# Altium PCB Monostable_generator_PIC10(L)F322.PcbDoc
Units mm, origin at the board's own origin, x right, y up, seen from the top; angles counter-clockwise.
Board outline 24.4 x 24.4 mm, 2 copper layers (Top Layer, Bottom Layer), stack 1.672 mm thick; 11 components, 12 nets, 33 pads, 1 vias.
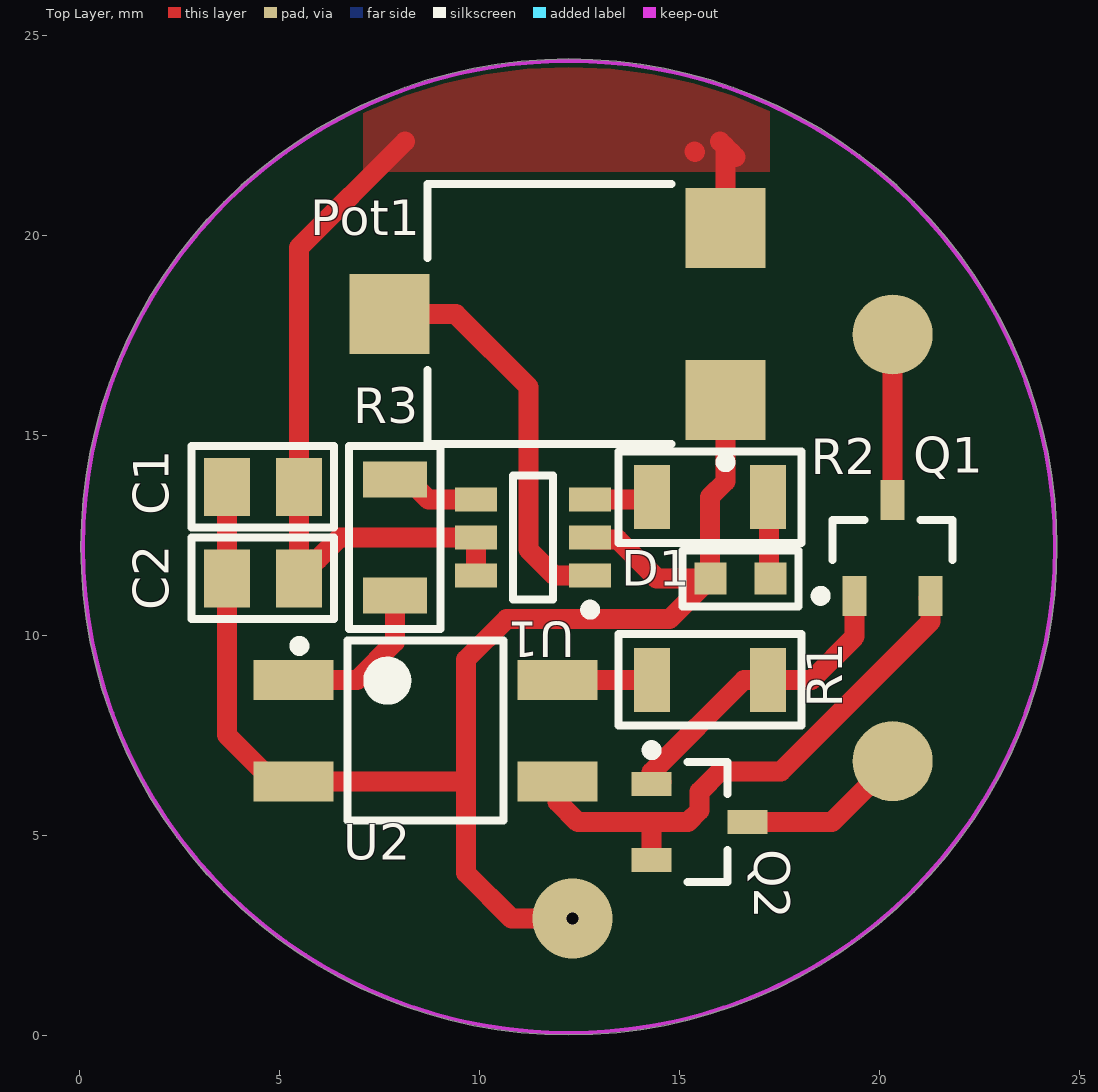
[diagram p0: Top Layer view]
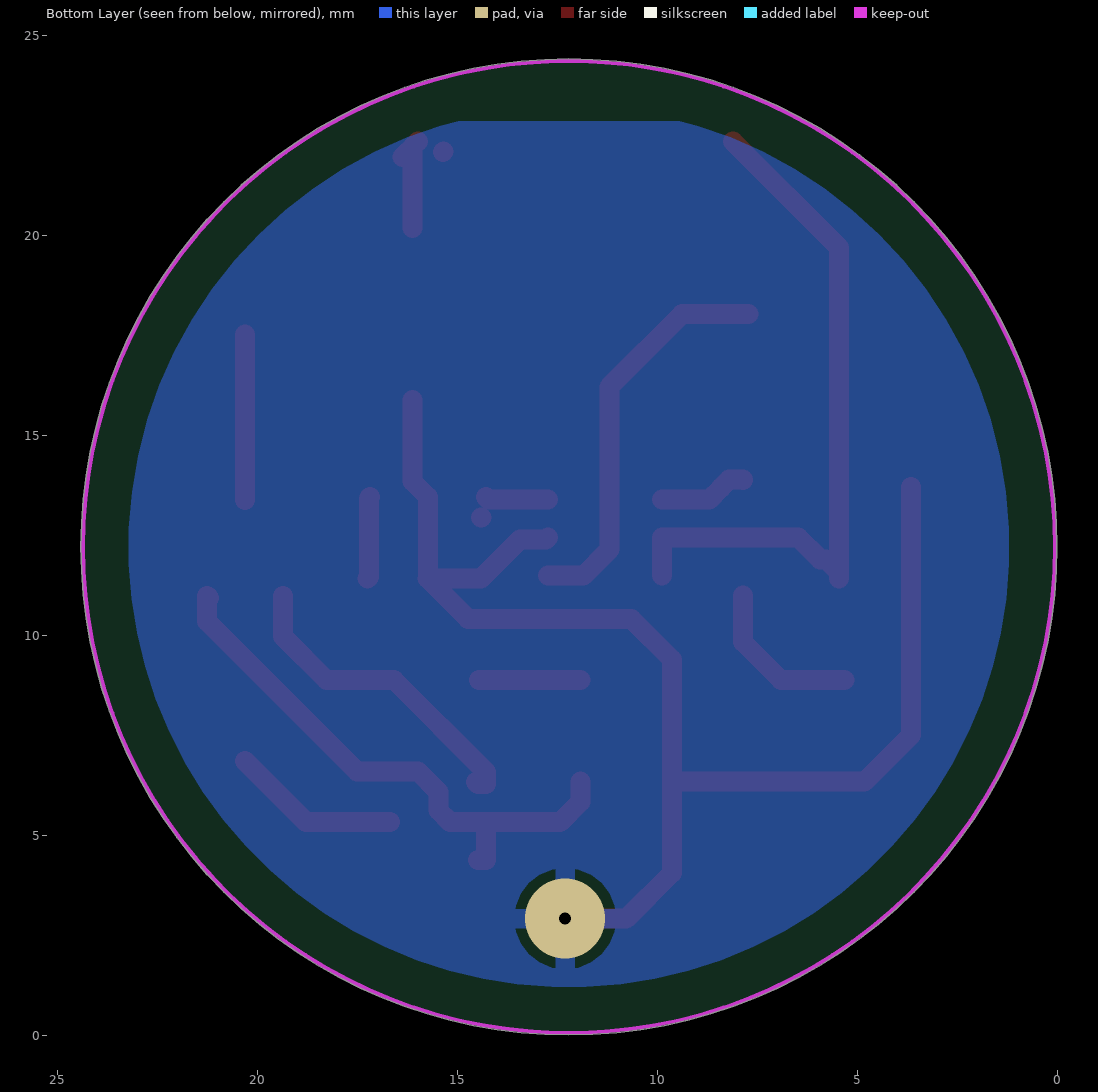
[diagram p1: Bottom Layer view, seen from below]
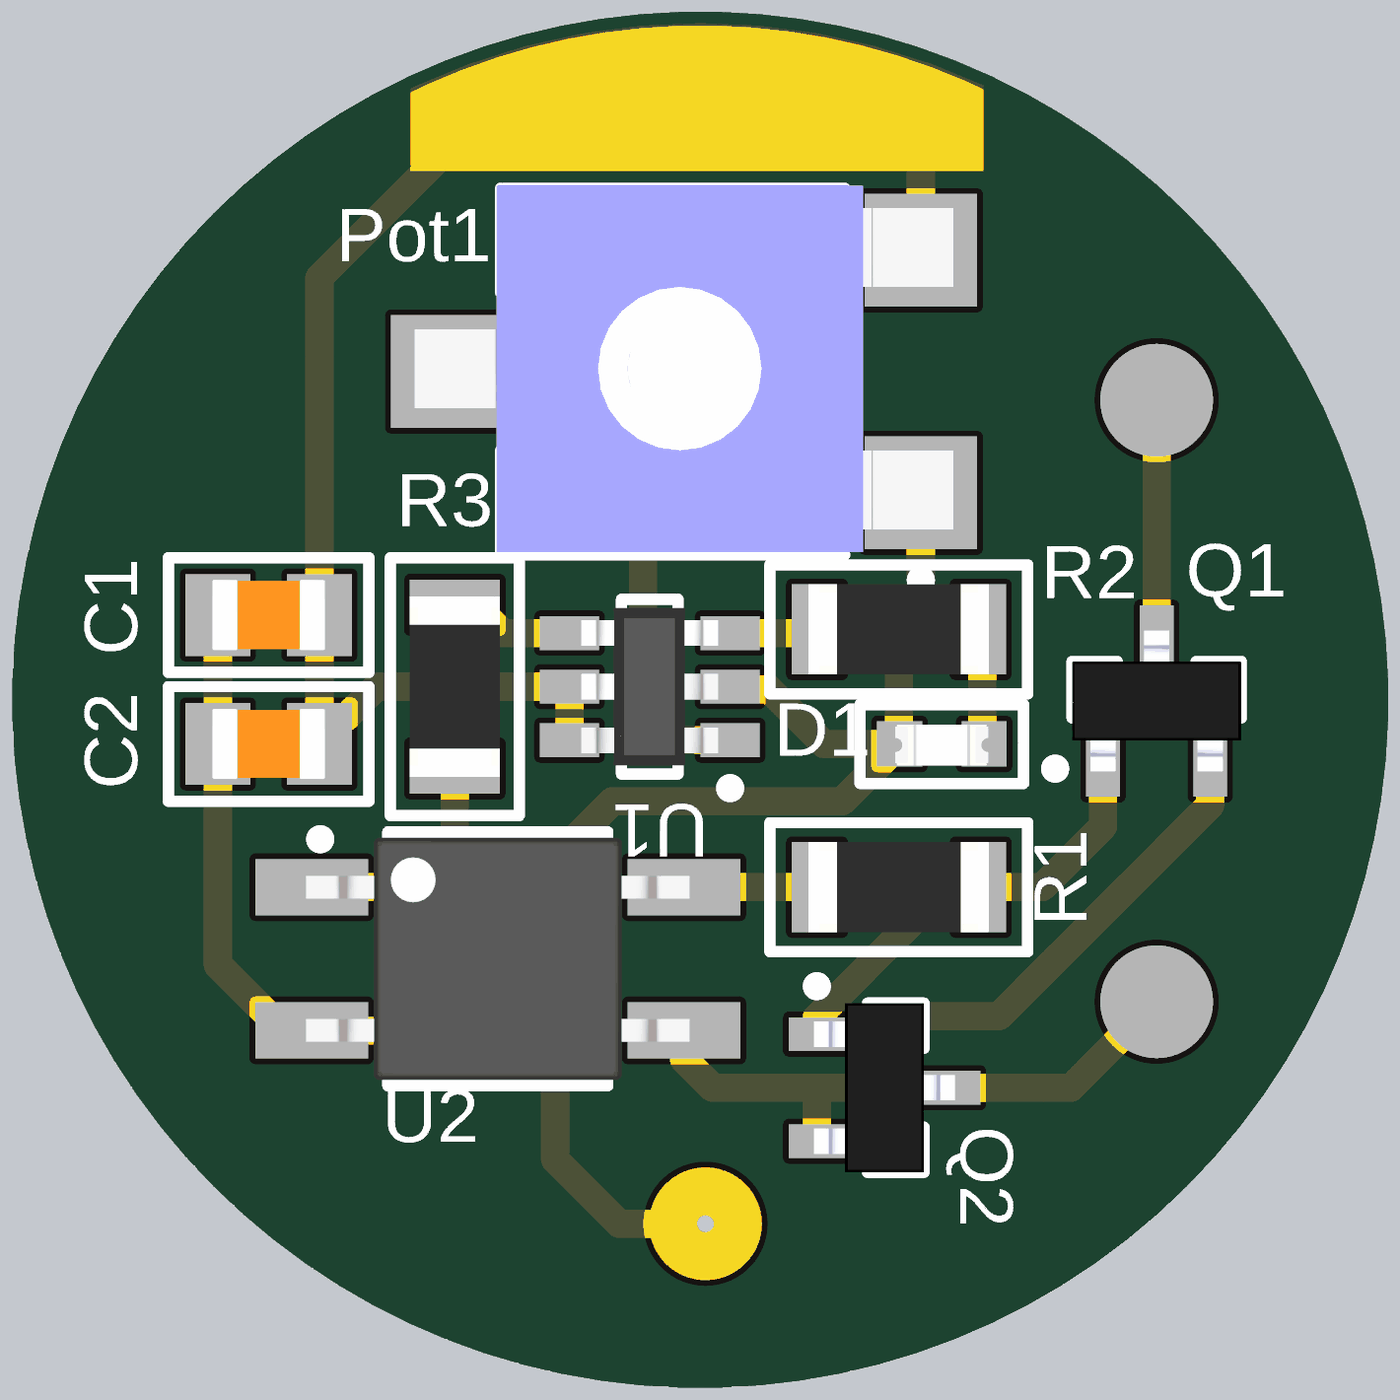
[diagram p2: 3D render of the assembled board from above, using the file's embedded part models]

## Layer stack, top to bottom
Top Solder: solder mask 0.01, Solder Resist, Dk 3.5
Top Layer: signal copper 0.036
Dielectric 1: dielectric 1.6, FR-4, Dk 4.8
Bottom Layer: signal copper 0.036
Bottom Solder: solder mask 0.01, Solder Resist, Dk 3.5

## Board outline
0.026,12.214 ccw(c12.226,12.214) 12.226,0.014 ccw(c12.226,12.214) 24.426,12.214 ccw(c12.226,12.214) 12.226,24.414 ccw(c12.226,12.214)

## Design rules (kind name [scope] priority, off if disabled: settings)
Clearance Clearance_1 [All] p1: gap=0.3 ignorepadtopadclearanceinfootprint=FALSE except(0.1: Arc-Arc Arc-Track Arc-SMDPad Arc-THPad Arc-Via Arc-Fill Arc-Poly Arc-Region Arc-Text Arc-Hole Track-Track Track-SMDPad Track-THPad Track-Via Track-Fill Track-Poly Track-Region Track-Text Track-Hole Fill-Poly Poly-Poly)
DiffPairsRouting [All] p1: maxlimit=0.254 minlimit=0.254 mostfreqgap=0.254 substack1={B853E7DB-7B4C-4E3B-BF90-81C25D066CF4} toplayer_{b853e7db-7b4c-4e3b-bf90-81c25d066cf4}_minwidth=0.381 toplayer_{b853e7db-7b4c-4e3b-bf90-81c25d066cf4}_maxwidth=0.381 toplayer_{b853e7db-7b4c-4e3b-bf90-81c25d066cf4}_prefwidth=0.381 bottomlayer_{b853e7db-7b4c-4e3b-bf90-81c25d066cf4}_minwidth=0.381 bottomlayer_{b853e7db-7b4c-4e3b-bf90-81c25d066cf4}_maxwidth=0.381 bottomlayer_{b853e7db-7b4c-4e3b-bf90-81c25d066cf4}_prefwidth=0.381 toplayer_minwidth=0.381 toplayer_maxwidth=0.381 toplayer_prefwidth=0.381 bottomlayer_minwidth=0.381 bottomlayer_maxwidth=0.381 bottomlayer_prefwidth=0.381 maxuncoupledlength=12.7
PolygonConnect [All] p1: connectstyle=Relief reliefconductorwidth=0.254 reliefentries=4 polygonreliefangle="90 Angle" airgapwidth=0.254
RoutingVias [All] p1: holewidth=0.9 width=2.6 viastyle="Through Hole" minholewidth=0.8 minwidth=2 maxholewidth=1.3 maxwidth=2.6
SolderMaskExpansion [All] p1: expansion=0.102 istentingtop=FALSE
UnRoutedNet [All] p1: checkbadconnections=TRUE
Width [All] p1: maxlimit=1 minlimit=0.254 preferedwidth=0.5 substack1={B853E7DB-7B4C-4E3B-BF90-81C25D066CF4} checkconnectedcopper=TRUE
28 further rules are at their usual default settings.

## Components (designator, comment, footprint, x,y, rotation, side; value= is the part's Value field where it differs from the comment)
C1 "C0805C104M3RACTU" CAPACITOR 4.572,13.716 r0 top
C2 "C0805C104M3RACTU" CAPACITOR 4.572,11.43 r0 top
D1 "LED" DIODE 16.51,11.43 r180 top
Pot1 "3305SMD" CA6XVSMD 11.938,18.034 r180 top
Q1 "BSS205NH6327" SOT95P250X110-3N 20.32,12.192 r90 top
Q2 "BSS205NH6327" SOT95P250X110-3N 15.494,5.334 r0 top
R1 "SWR1206-24R-5%" RESISTOR 15.748,8.89 r180 top
R2 "SWR1206-24R-5%" RESISTOR 15.748,13.462 r180 top
R3 "SWR1206-24R-5%" RESISTOR 7.874,12.446 r270 top
U1 "MCU" SOT95P270X145-6N 11.331,12.446 r180 top
U2 "APV2121S" SOP254P680X210-4N 8.636,7.62 r0 top

## Footprints (in the part's own frame and the unit in brackets; to place one, negate y for a bottom-side part, rotate by r counter-clockwise, add the part's x,y. Pads: shape width x height; smd on the part's side, far side on the other; paste and mask are expansions set on the pad)
CA6XVSMD [mm] "SOT23, 3-Leads, Body 6,45x9,80mm, Pitch 2,15mm, IPC Medium Density"
  rect 2x2 smd: 1(-4.2,2.15) 2(4.2,0) 3(-4.2,-2.15)
  silkscreen extent -4.33,-3.25 3.25,3.82, body extent -4.77,-3.3 4.77,3.2, height 3.92
CAPACITOR [mm]
  rect 1.15x1.45 smd: 1(-0.9,0) 2(0.9,0)
  silkscreen extent -1.78,-1.02 1.78,1.02, body extent -1,-0.62 1,0.63, height 0.79
DIODE [mm]
  rect 0.8x0.8 smd: A(-0.75,0) K(0.75,0)
  silkscreen extent -1.45,-0.7 1.45,0.7, body extent -0.83,-0.34 0.83,0.38, height 0.68
RESISTOR [mm]
  rect 0.9x1.6 smd: 1(-1.45,0) 2(1.45,0)
  silkscreen extent -2.29,-1.14 2.29,1.14, body extent -1.6,-0.8 1.6,0.8, height 0.6
SOP254P680X210-4N [mm] "SOP, 4-Leads, Body 4,30x4,40mm, Pitch 2,54mm, IPC Medium Density"
  rect 2x1 smd: 1(-3.302,1.27) 2(-3.302,-1.27) 3(3.302,-1.27) 4(3.302,1.27)
  silkscreen extent -3.27,-2.25 1.95,2.25, body extent -3.4,-2.15 3.4,2.15, height 2.1
SOT95P250X110-3N [mm] "SOT23, 3-Leads, Body 2,90x2,50mm, Pitch 0,95mm, IPC Medium Density"
  rect 1x0.6 smd: 1(-1.2,0.95) 2(-1.2,-0.95) 3(1.2,0)
  silkscreen extent -1.32,-1.5 0.7,1.92, body extent -1.25,-1.5 1.25,1.5, height 1.09
SOT95P270X145-6N [mm] "SOT23, 6-Leads, Body 2,90x2,70mm, Pitch 0,95mm, IPC Medium Density"
  rect 1.05x0.6 smd: 1(-1.425,0.95) 2(-1.425,0) 3(-1.425,-0.95) 4(1.425,-0.95) 5(1.425,0) 6(1.425,0.95)
  silkscreen extent -1.55,-1.55 0.5,1.92, body extent -1.21,-1.4 1.21,1.4, height 1.09

## Part data
C1 C2: "CAP CER 0.1UF 25V X7R 0805", Capacity_number=C?, Case Code (Imperial)=0805, Case Code (Metric)=2012, Dielectric=X7R, Dielectric Material=Ceramic, Manufacturer=KEMET, Max Operating Temperature=125°C, Min Operating Temperature=-55°C, Package Quantity=1, Supplier Part Number 1=399-8000-1-ND, Tolerance=20%, Voltage=25V, =100nF, Case/Package=0805, Category="Ceramic Capacitors", ComponentLink1Description=http://components.arrow.com/part/dataview/2091097S3491315N7429?src-supplier=Arrow+Electronics, ComponentLink1URL=http://components.arrow.com/part/dataview/2091097S3491315N7429?src-supplier=Arrow+Electronics, ComponentLink2Description=http://uk.rs-online.com/webdocs/13da/0900766b813da9ff.pdf?src-supplier=RSComponents, ComponentLink2URL=http://uk.rs-online.com/webdocs/13da/0900766b813da9ff.pdf?src-supplier=RSComponents, ComponentLink3Description=http://components.arrow.com/part/dataview/0323_00178100?src-supplier=Arrow+Europe, ComponentLink3URL=http://components.arrow.com/part/dataview/0323_00178100?src-supplier=Arrow+Europe, ComponentLink4Description=http://uk.rs-online.com/webdocs/13da/0900766b813daa05.pdf?src-supplier=RSComponents, ComponentLink4URL=http://uk.rs-online.com/webdocs/13da/0900766b813daa05.pdf?src-supplier=RSComponents, ComponentLink5Description=https://www.alliedelec.com/m/d/6f3b5eb83d09db50ed28bdc730567b33.pdf?src-supplier=Allied+Electronics, ComponentLink5URL=https://www.alliedelec.com/m/d/6f3b5eb83d09db50ed28bdc730567b33.pdf?src-supplier=Allied+Electronics, ComponentLink6Description=http://www.farnell.com/datasheets/2746330.pdf?src-supplier=Farnell, ComponentLink6URL=http://www.farnell.com/datasheets/2746330.pdf?src-supplier=Farnell, ComponentLink7Description=https://www.alliedelec.com/m/d/e7aa2b5497e2375e4ffc0e8be19e16e2.pdf?src-supplier=Allied+Electronics, ComponentLink7URL=https://www.alliedelec.com/m/d/e7aa2b5497e2375e4ffc0e8be19e16e2.pdf?src-supplier=Allied+Electronics, ComponentLink8Description=http://www.jameco.com/Jameco/Products/ProdDS/1566487.pdf?src-supplier=Jameco, ComponentLink8URL=http://www.jameco.com/Jameco/Products/ProdDS/1566487.pdf?src-supplier=Jameco, ComponentLink9Description=http://www.mouser.com/ds/2/212/KEM_C1002_X7R_SMD-1102033.pdf?src-supplier=Mouser, ComponentLink9URL=http://www.mouser.com/ds/2/212/KEM_C1002_X7R_SMD-1102033.pdf?src-supplier=Mouser, ComponentLink10Description=http://www.farnell.com/datasheets/2746330.pdf?src-supplier=Element14, ComponentLink10URL=http://www.farnell.com/datasheets/2746330.pdf?src-supplier=Element14, ComponentLink11Description=http://www.farnell.com/datasheets/1828800.pdf?src-supplier=Newark, ComponentLink11URL=http://www.farnell.com/datasheets/1828800.pdf?src-supplier=Newark, ComponentLink12Description=http://www.farnell.com/datasheets/2746330.pdf?src-supplier=Newark, ComponentLink12URL=http://www.farnell.com/datasheets/2746330.pdf?src-supplier=Newark, ComponentLink13Description=http://capacitoredge.kemet.com/capedge2/DataSheet?pn=C0805C104M3RACTU&src-supplier=Avnet, ComponentLink13URL=http://capacitoredge.kemet.com/capedge2/DataSheet?pn=C0805C104M3RACTU&src-supplier=Avnet, ComponentLink14Description=https://api.kemet.com/component-edge/download/datasheet/C0805C104M3RACTU.pdf?src-supplier=Digi-Key, ComponentLink14URL=https://api.kemet.com/component-edge/download/datasheet/C0805C104M3RACTU.pdf?src-supplier=Digi-Key, Depth=1.25mm, Dissipation Factor=5%, Height=0.9mm, Lead Pitch=0.75mm, Length=2mm, Manufacturer Part Number=C0805C104M3RACTU, Mount="Surface Mount", Packaging="Tape and Reel", Pricing 1="1=0,10000, 10=0,06500, 50=0,03520, 100=0,02870, 500=0,02052, 1000=0,01613 (USD)", Radiation Hardening=No, REACH SVHC="No SVHC", RoHS=Yes, Stock 1=353956, Supplier 1=Digi-Key, Termination=SMD/SMT, Thickness=0.035inch, Voltage Rating=25V, Voltage Rating (DC)=25V, Width=0.049inch
D1: library part OSO50603C1E, "LED; SMD; 0603; orange; 100-200mcd; 1.6x0.8mm; 120°; 5m", Manufacturer=OptoSupply, Manufacturer Part Number=OSO50603C1E, Parameter 1=LED, RoHS=No, Stock 1=33850, Supplier 1=TME, Supplier Part Number 1=OSO50603C1E
Q1 Q2: "Single N-Channel 20 V 50 mOhm 2.1 nC OptiMOS? Small Signal Mosfet - SOT-23", Case/Package=TO-236-3, Continuous Drain Current (ID)=2.5A, Drain to Source Resistance=85mR, Drain to Source Voltage (Vdss)=20V, Gate to Source Voltage (Vgs)=12V, Input Capacitance=419pF, Manufacturer=Infineon, Max Operating Temperature=150°C, Max Power Dissipation=500mW, Min Operating Temperature=-55°C, Package Quantity=1, Supplier Part Number 1=BSS205NH6327XTSA1CT-ND, Category=MOSFETs, ComponentLink1Description=https://datasheet.ciiva.com/6379/infineon-bss205n-ds-v02-04-en-6379889.pdf?src-supplier=Digi-Key, ComponentLink1URL=https://datasheet.ciiva.com/6379/infineon-bss205n-ds-v02-04-en-6379889.pdf?src-supplier=Digi-Key, ComponentLink2Description=https://datasheet.ciiva.com/6379/infineon-bss205n-ds-v02-04-en-6379886.pdf?src-supplier=Digi-Key, ComponentLink2URL=https://datasheet.ciiva.com/6379/infineon-bss205n-ds-v02-04-en-6379886.pdf?src-supplier=Digi-Key, ComponentLink3Description=https://datasheet.ciiva.com/11171/infineon-bss205n-ds-v02-04-en-11171467.pdf?src-supplier=Avnet, ComponentLink3URL=https://datasheet.ciiva.com/11171/infineon-bss205n-ds-v02-04-en-11171467.pdf?src-supplier=Avnet, Element Configuration=Single, Fall Time=2.4ns, Height=1.3mm, Length=2.9mm, Manufacturer Part Number=BSS205NH6327, Mount="Surface Mount", number=Q?, Number of Pins=3, Packaging="Cut Tape", Pricing 1="1=0,50000, 10=0,37700, 100=0,23480, 500=0,16068, 1000=0,12360 (USD)", Rds On Max=50mR, Rise Time=2.9ns, RoHS=Yes, RoHS Compliant=Yes, Series=OptiMOS™, Stock 1=9097, Supplier 1=Digi-Key, Turn-Off Delay Time=11ns, Turn-On Delay Time=5.8ns, Width=0.1mm
U1: library part PIC10F322-I/OT, "RISC Microcontroller, 8-Bit, FLASH, PIC10 CPU, 20MHz, CMOS, PDSO6", Case/Package=SOT-23, Frequency=20MHz, Manufacturer=Microchip, Max Frequency=16MHz, Max Operating Temperature=85°C, Max Power Dissipation=800mW, Max Supply Voltage=5.5V, Min Operating Temperature=-40°C, Min Supply Voltage=2.5V, Nominal Supply Current=800uA, Address Bus Width=8b, Category=Microcontrollers, ComponentLink1Description=https://datasheet.ciiva.com/7665/41597a-7665378.pdf?src-supplier=Element14, ComponentLink1URL=https://datasheet.ciiva.com/7665/41597a-7665378.pdf?src-supplier=Element14, ComponentLink2Description=https://datasheet.ciiva.com/4838/41566b-59364-4838000.pdf?src-supplier=Mouser, ComponentLink2URL=https://datasheet.ciiva.com/4838/41566b-59364-4838000.pdf?src-supplier=Mouser, ComponentLink3Description=https://datasheet.ciiva.com/26937/getdatasheetpartid-765326-26937785.pdf?src-supplier=Verical, ComponentLink3URL=https://datasheet.ciiva.com/26937/getdatasheetpartid-765326-26937785.pdf?src-supplier=Verical, ComponentLink4Description=https://datasheet.ciiva.com/14100/pic10-l-lf320-322-eng-tds-14100591.pdf?src-supplier=Distrelec, ComponentLink4URL=https://datasheet.ciiva.com/14100/pic10-l-lf320-322-eng-tds-14100591.pdf?src-supplier=Distrelec, ComponentLink5Description=https://datasheet.ciiva.com/7665/1506141-7665675.pdf?src-supplier=Element14, ComponentLink5URL=https://datasheet.ciiva.com/7665/1506141-7665675.pdf?src-supplier=Element14, ComponentLink6Description=https://datasheet.ciiva.com/9233/41585a-9233513.pdf?src-supplier=Avnet, ComponentLink6URL=https://datasheet.ciiva.com/9233/41585a-9233513.pdf?src-supplier=Avnet, ComponentLink7Description=https://datasheet.ciiva.com/16352/filehandler-aspxddocname-en555020-16352362.pdf?src-supplier=Future+Electronics, ComponentLink7URL=https://datasheet.ciiva.com/16352/filehandler-aspxddocname-en555020-16352362.pdf?src-supplier=Future+Electronics, ComponentLink8Description=https://datasheet.ciiva.com/17387/41585a-17387829.pdf?src-supplier=Avnet+Europe, ComponentLink8URL=https://datasheet.ciiva.com/17387/41585a-17387829.pdf?src-supplier=Avnet+Europe, ComponentLink9Description=https://datasheet.ciiva.com/1487/41585a-1487032.pdf?src-supplier=Digi-Key, ComponentLink9URL=https://datasheet.ciiva.com/1487/41585a-1487032.pdf?src-supplier=Digi-Key, Core Architecture=PIC, Data Bus Width=8b, Height=1.3mm, Lead Free="Lead Free", Length=3.1mm, Manufacturer Part Number=PIC10F322-I/OT, Memory Size=0.875KB, Memory Type=FLASH, Number of ADC Channels=3, Number of I/Os=3, Number of Pins=6, Number of Programmable I/O=4, Number of PWM Channels=1, Number of Timers/Counters=2, Packaging=Bag, Peripherals=PWM,POR,WDT, Radiation Hardening=No, RAM Size=64B, REACH SVHC="No SVHC", RoHS=Yes, RoHS Compliant=Yes, Supplier 1=TME, Supplier Part Number 1=PIC10F322-I/OT, Supply Current=800uA, Watchdog Timer=Yes, Width=1.8mm
U2: "Photovoltaic MOSFET Driver , 4-pin SOP,", Case/Package=SOP, Forward Current=50mA, Forward Voltage=1.5V, Isolation Voltage=2.5kV, Manufacturer=Panasonic, Max Operating Temperature=85°C, Max Output Voltage=8.2V, Max Power Dissipation=75mW, Min Operating Temperature=-40°C, Output Current=8uA, Output Voltage=5V, Package Quantity=100, Supplier Part Number 1=255-2658-ND, Category="Solid State Relays", ComponentLink1Description=https://datasheet.ciiva.com/24491/semi-eng-apv-24491093.pdf?src-supplier=Onlinecomponents.com, ComponentLink1URL=https://datasheet.ciiva.com/24491/semi-eng-apv-24491093.pdf?src-supplier=Onlinecomponents.com, ComponentLink2Description=https://datasheet.ciiva.com/1526/625948-1526211.pdf?src-supplier=Element14, ComponentLink2URL=https://datasheet.ciiva.com/1526/625948-1526211.pdf?src-supplier=Element14, Input Current=50mA, Input Type=DC, Lead Free="Lead Free", Manufacturer Part Number=APV2121S, Mount="Surface Mount", Number of Channels=1, Number of Elements=1, Number of Pins=4, Output Current per Channel=8uA, Packaging=Rail/Tube, Power Dissipation=75mW, Pricing 1="1=2,89000, 10=1,92600, 100=1,48220, 500=1,33984, 1000=1,18500 (USD)", REACH SVHC="No SVHC", Reverse Breakdown Voltage=5V, Reverse Voltage (DC)=5V, RMS Current (Irms)=8uA, RoHS=Yes, RoHS Compliant=Yes, Series=-, Stock 1=1023, Supplier 1=Digi-Key, Termination=SMD/SMT, Voltage Rating (DC)=2.5kV

## Free pads (board coordinates)
  round 2 smd: 3(20.32,6.858) 3(20.32,17.526)

## Via types
v1: diameter 2/2 (per signal layer), hole 0.3, Top Layer to Bottom Layer, 1 vias

## Nets (pads, with @x,y where several pads share a name; then routed paths per layer and width w, separated by ;. In a path a pad name is that pad's centre, name@x,y a point inside that pad or via, vN(x,y) a via of type N, cw(c..) or ccw(c..) an arc to the next point about the centre after c; other vN are vias at no path point)
GND: C1.1 C2.1 D1.K Pot1.1 U1.2 U2.2 | length 36.1
  Top Layer w0.5: C1.1 C2.1 3.672,7.512 4.834,6.35 U2.2 9.647,6.35 9.652,6.355 ; v1(12.319,2.921) 10.795,2.921 9.652,4.064 9.652,6.355 ; U1.2 12.806,12.396 13.454,12.396 14.42,11.43 D1.K ; Pot1.1 16.138,13.852 15.748,13.462 15.748,11.442 D1.K ; 9.652,6.355 9.652,9.398 10.668,10.414 14.744,10.414 D1.K
Net_1: pad.3@20.32,17.526 Q1.3 | length 4.1
  Top Layer w0.5: Q1.3 pad.3@20.32,17.526
Net_2: pad.3@20.32,6.858 Q2.3 | length 4.3
  Top Layer w0.5: Q2.3 18.796,5.334 pad.3@20.32,6.858
NetD1_A: D1.A R2.1 | length 2.1
  Top Layer w0.5: R2.1 17.229,13.431 17.229,11.461 D1.A
NetPot1_2: Pot1.2 U1.1 | length 10.1
  Top Layer w0.5: Pot1.2 9.398,18.034 11.215,16.217 11.215,12.145 11.864,11.496 U1.1
NetQ1_1: Q1.1 Q2.1 R1.1 | length 8.1
  Top Layer w0.5: Q2.1@14.544,6.334 14.494,6.284 Q2.1 14.294,6.584 16.6,8.89 R1.1 18.288,8.89 19.37,9.972 Q1.1
NetQ1_2: Q1.2 Q2.2 U2.3 | length 14.3
  Top Layer w0.5: U2.3 11.938,5.842 12.446,5.334 14.294,5.334 ; Q2.2@14.494,4.384 Q2.2 14.294,5.334 ; 15.489,6.09 15.489,5.627 15.197,5.334 14.892,5.334 14.294,5.334 ; 15.494,6.096 16.002,6.604 17.526,6.604 21.27,10.348 Q1.2 Q1.2@21.22,10.942
NetR1_2: R1.2 U2.4 | length 2.5
  Top Layer w0.5: U2.4 R1.2@14.478,8.89
NetR2_2: R2.2 U1.3 | length 1.6
  Top Layer w0.5: U1.3 14.232,13.396 R2.2 ; R2.2@14.416,12.951 R2.2@14.43,12.951
NetR3_1: R3.1 U1.4 | length 2.2
  Top Layer w0.5: R3.1@7.877,13.893 R3.1 8.224,13.896 8.424,13.696 8.424,13.689 8.717,13.396 U1.4
NetR3_2: R3.2 U2.1 | length 4.1
  Top Layer w0.5: U2.1 6.928,8.89 7.874,9.836 R3.2
VCC: C1.2 C2.2 Pot1.3 U1.5 U1.6 | length 20.2
  Top Layer w0.5: C2.2 C2.2@5.472,11.58 ; 8.128,22.352 5.472,19.696 C1.2 C2.2@5.472,11.58 ; U1.6 U1.5 6.488,12.446 5.947,11.905 5.797,11.905 C2.2@5.472,11.58 ; 15.367,22.098 15.376,22.089 ; 16.002,22.352 16.138,22.216 Pot1.3 ; 16.256,22.098 16.392,21.962

## Polygon pours and split planes (outlines as drawn)
VCC on Top Solder "NONET_L01_P026" (solid, pour order 26): 7.084,21.59 17.244,21.59 17.244,23.04 ccw(c12.221,12.432) 12.162,24.169 ccw(c12.236,12.411) 7.084,22.98
GND on Bottom Layer "Bottom Layer-GND" (solid, pour order 37): 1.226,12.214 ccw(c12.226,12.214) 12.226,1.214 ccw(c12.226,12.214) 23.226,12.214 ccw(c12.226,12.214) 20.856,19.035 ccw(c12.226,12.214) 14.994,22.86 9.458,22.86 ccw(c12.226,12.214) 3.596,19.035 ccw(c12.226,12.214)
VCC on Bottom Solder (solid): 6.02,21.296 6.02,18.288 18.432,18.288 18.432,21.296 ccw(c12.228,12.218) 14.994,22.86 9.458,22.86 ccw(c12.225,12.217)
VCC on Top Layer "VCC_L01_P020" (solid, remove dead copper, pour order 20): 7.089,21.59 17.249,21.59 17.249,23.332 ccw(c12.338,12.743) 12.17,24.414 ccw(c12.099,12.713) 7.089,23.287

## Keep-outs
Keep-Out Layer:
  circle w0.1: c12.226,12.214 r12.15

## Silkscreen, mask and mechanical layers (free items; w line width, h text height)
Board Outline (Mech29):
  circle w0.1: c12.226,12.214 r12.15